# Altium PCB PCB1.PcbDoc
Units mm, origin at the board's own origin, x right, y up, seen from the top; angles counter-clockwise.
Board outline 47.12 x 28.32 mm, 2 copper layers (Top Layer, Bottom Layer); 13 components, 14 nets, 29 pads, 0 vias.
Unrouted connection lines stored in the file: 5.
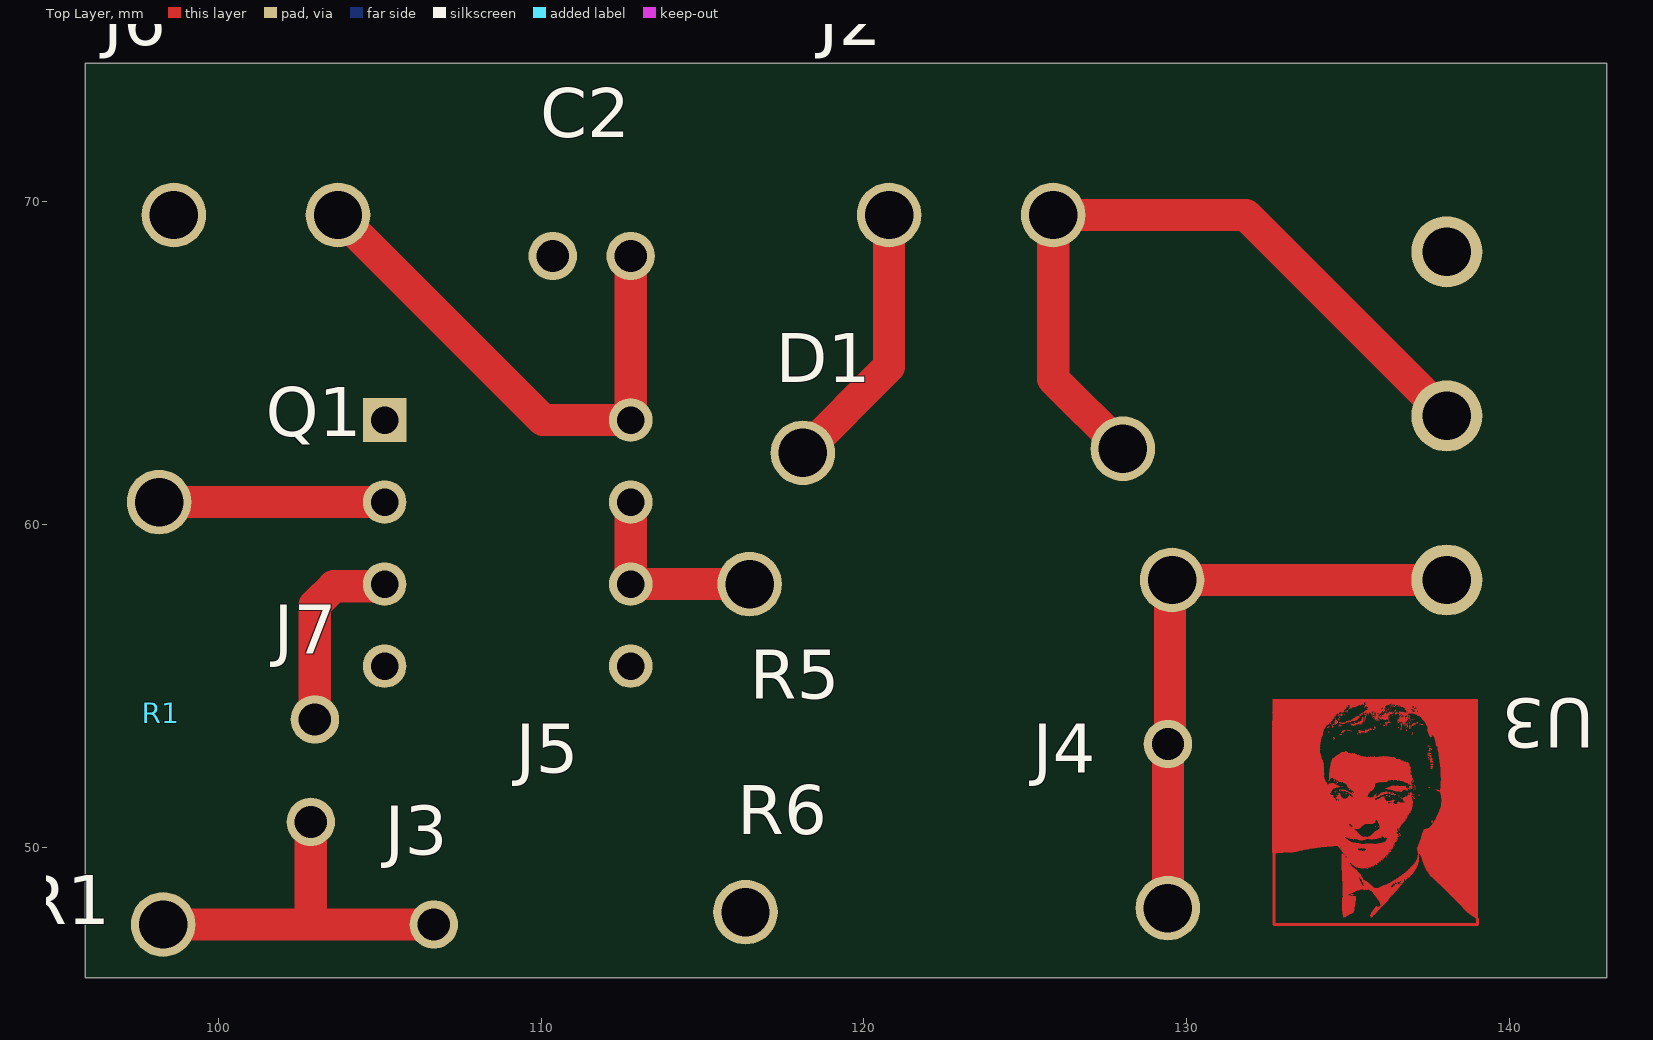
[diagram p0: Top Layer view]
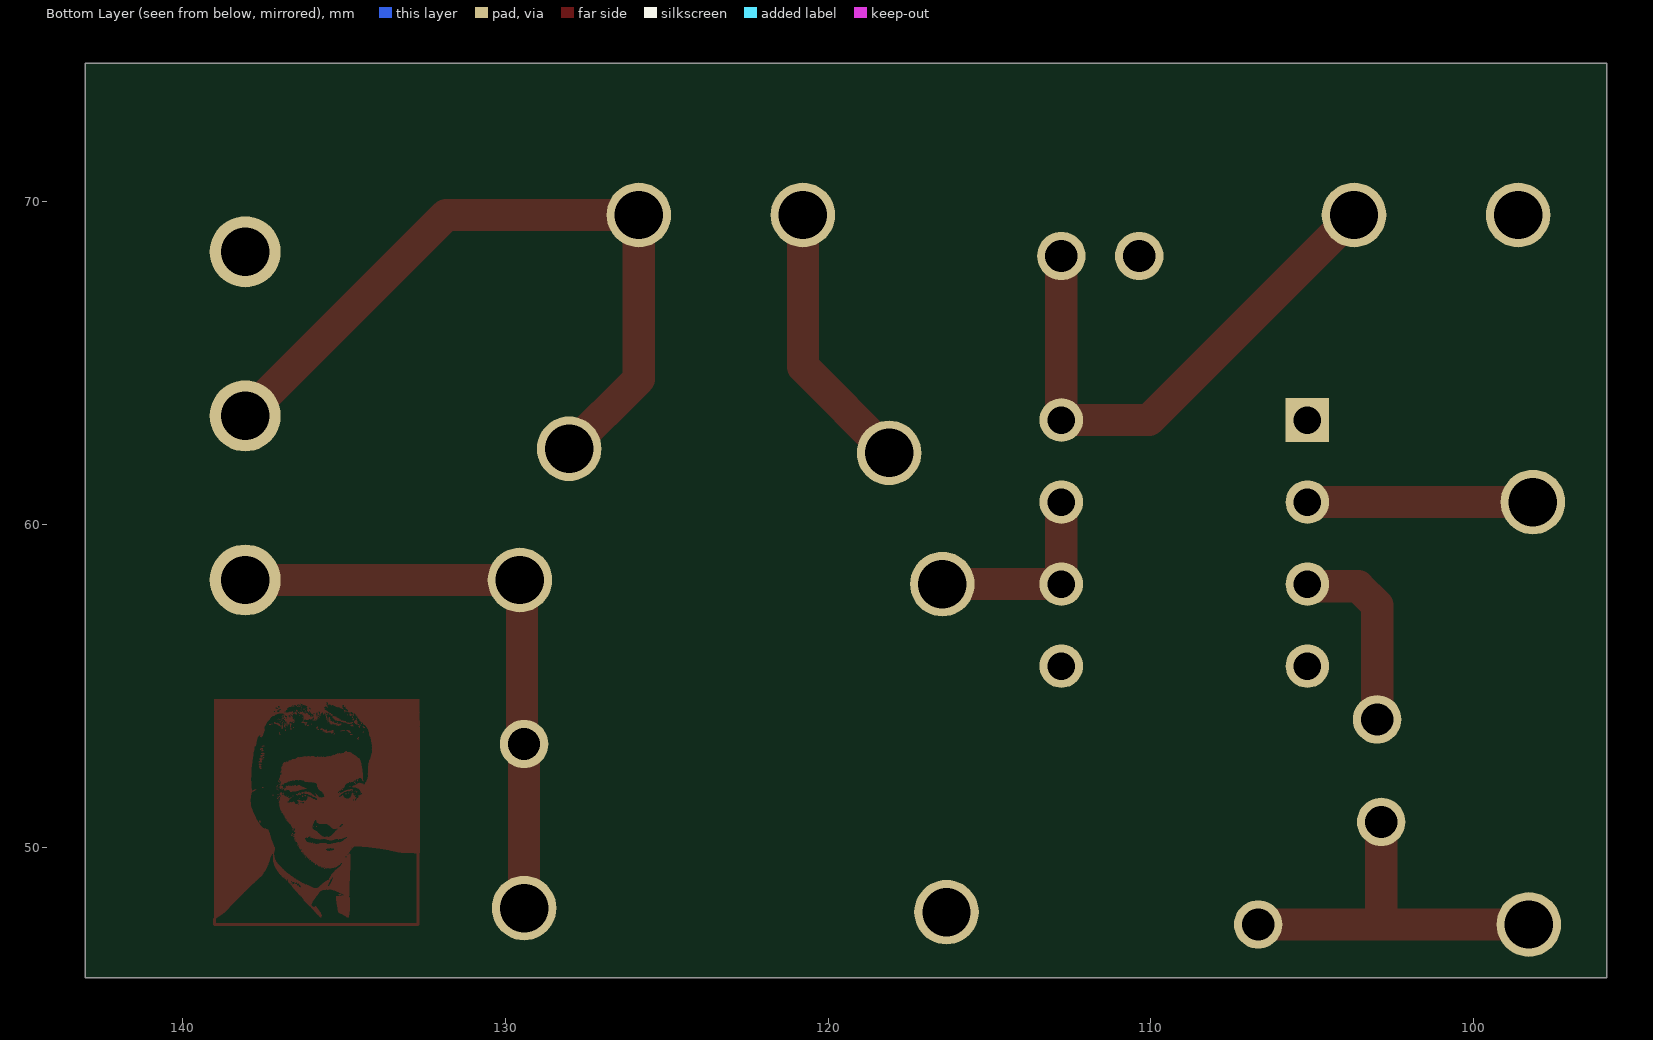
[diagram p1: Bottom Layer view, seen from below]
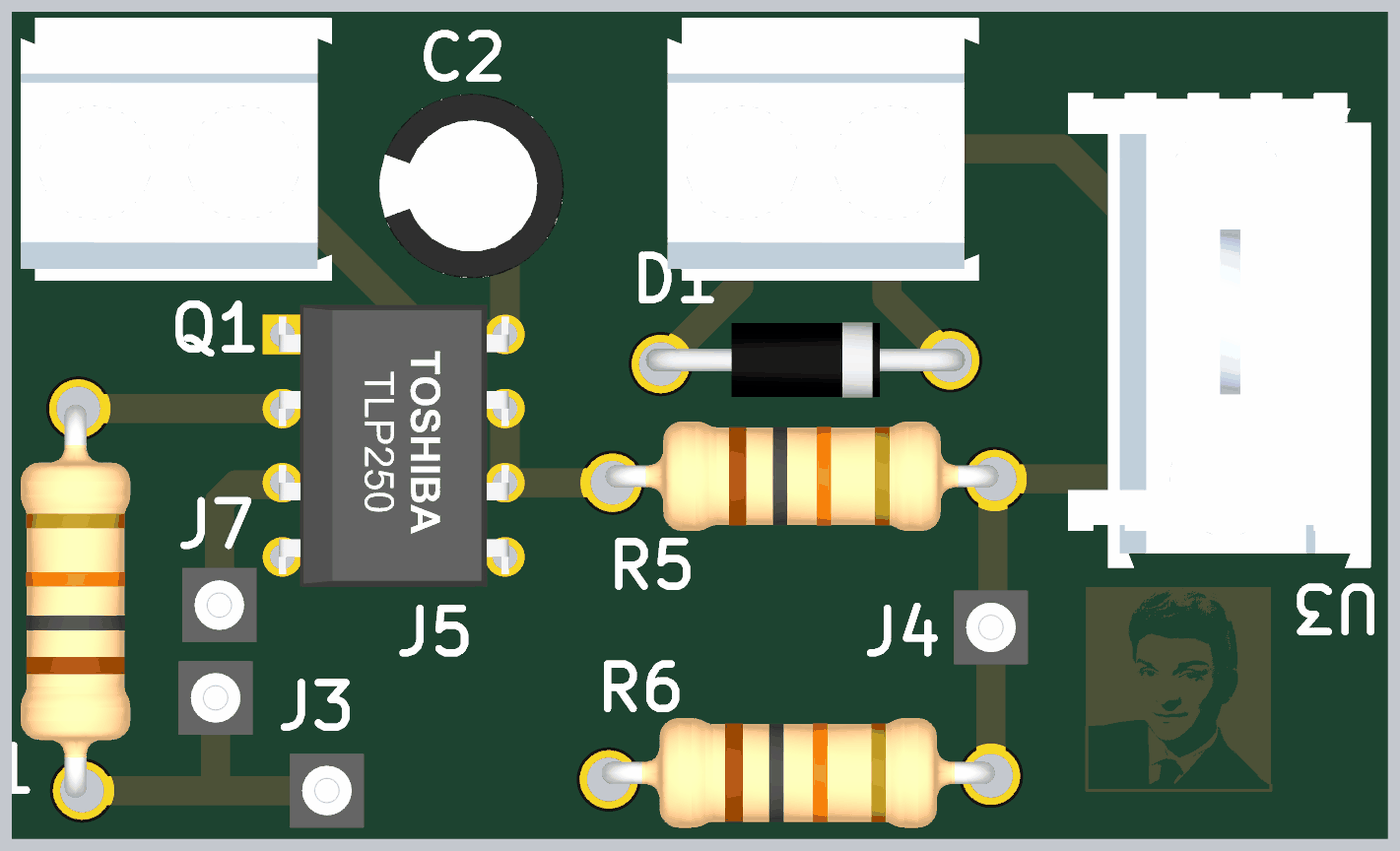
[diagram p2: 3D render of the assembled board from above, using the file's embedded part models]

## Layer stack, top to bottom
Top Solder: solder mask 0.0102, Solder Resist, Dk 3.5
Top Layer: signal copper 0.0356
Dielectric 1: dielectric 0.32, FR-4, Dk 4.8
Bottom Layer: signal copper 0.0356
Bottom Solder: solder mask 0.0102, Solder Resist, Dk 3.5

## Board outline
95.885,45.974 143.002,45.974 143.002,74.295 95.885,74.295

## Design rules (kind name [scope] priority, off if disabled: settings)
Clearance [All] p1: gap=0.4 ignorepadtopadclearanceinfootprint=FALSE
PolygonConnect [All] p1: connectstyle=Relief reliefconductorwidth=0.4 reliefentries=4 polygonreliefangle="90 Angle" airgapwidth=0.4
RoutingVias [All] p1: holewidth=0.711 width=1.27 viastyle="Through Hole" minholewidth=0.711 minwidth=1.27 maxholewidth=0.711 maxwidth=1.27
SolderMaskExpansion [All] p1: expansion=0.102 istentingtop=FALSE
Width [All] p1: maxlimit=2 minlimit=0.1 preferedwidth=1.5 minimp=50.000000 maximp=50.000000 favimp=50.000000
30 further rules are at their usual default settings.

## Components (designator, comment, footprint, x,y, rotation, side; value= is the part's Value field where it differs from the comment)
C2 "CAP" "Cap 5x10" 112.776,68.326 r180 top
D1 "Diode 1N5822" Diode 118.11,62.23 r180 top
J2 "Terminal" Terminal 125.857,69.596 r180 top
J3 "Header 1x1" "Header 1x1" 102.87,50.8 r0 top
J4 "Header 1x1" "Header 1x1" 129.413,53.213 r0 top
J5 "Header 1x1" "Header 1x1" 106.68,47.625 r0 top
J6 "Terminal" Terminal 103.712,69.596 r180 top
J7 "Header 1x1" "Header 1x1" 102.997,53.975 r0 top
Q1 "TLP250" FP-11-10C4-MFG 108.966,59.436 r0 top
R1 "THT RES Header" Res 98.171,60.706 r270 top
R5 "THT RES Header" Res 129.54,58.293 r180 top
R6 "THT RES Header" Res 129.413,48.133 r180 top
U3 "Logic_Mosfet" Logic_Mosfet 138.049,63.373 r90 top

## Footprints (in the part's own frame and the unit in brackets; to place one, negate y for a bottom-side part, rotate by r counter-clockwise, add the part's x,y. Pads: shape width x height; smd on the part's side, far side on the other; paste and mask are expansions set on the pad)
"Cap 5x10" [mm]
  round 1.5 hole 1: 1(0,0) 2(2.413,0)
  body extent -2.02,-3.16 4.3,3.16, height 1.6
Diode [mm]
  round 2 hole 1.5: 1(0,0) 2(-9.906,-0.127)
  body extent -10.41,-1.42 0.51,1.14, height 4.55
FP-11-10C4-MFG [mm]
  rect 1.35x1.35 hole 0.85 paste-1000 mask+0: 1(-3.81,3.81)
  round 1.35 hole 0.85 paste-1000 mask+0: 2(-3.81,1.27) 3(-3.81,-1.27) 4(-3.81,-3.81) 5(3.81,-3.81) 6(3.81,-1.27) 7(3.81,1.27) 8(3.81,3.81)
  body extent -5.26,-5.06 4.94,5.04, height 8.85
"Header 1x1" [mm]
  round 1.5 hole 1: 1(0,0)
  body extent -1.27,-1.27 1.27,1.27, height 6.02
Logic_Mosfet [mm]
  round 2.2 hole 1.5: 1(-5.08,0) 2(0,0) 3(5.08,0)
  body extent -8.13,-4.37 8.14,5.99, height 36.8
Res [mm]
  round 2 hole 1.5: 1(13.081,0.127) 2(0,0)
  body extent -0.13,-1.97 13.32,1.78, height 5.38
Terminal [mm]
  round 2 hole 1.5: 1(0,0) 2(5.08,0)
  body extent -3.15,-4.49 7.51,4.51, height 15.2

## Part data
C2: "Capacitor", ComponentLink1Description="Satın Alma Linki", ComponentLink1URL=https://www.robotistan.com/10nf-seramik-kondansator-paketi-10-adet, ComponentLink2Description="Satın Alma Linki", ComponentLink2URL=https://www.robotistan.com/1nf-seramik-kondansator-paketi-10-adet
D1: library part "Diode 1N5822 SMD", "SS34 1N5822 SMD Schottky Diode 3A 40V", ComponentLink1Description="Satın Alma Linki", ComponentLink1URL=https://bbcelektronik.com/diyot-diod-cesitleri/diyot-ve-kopru-diyot/prd-1n5819-1-amper-40-volt-smd-diyot-schottky-diyot-ss14-bbc13770, ComponentLink2Description=Datashhets, ComponentLink2URL=http://www.kesenes.com/pdf/1n5817-1n5819.pdf
J3 J4 J5 J7: "Header", ComponentLink3Description="Satın Alma Linki", ComponentLink3URL=https://www.robotistan.com/1x40-180-12mm
Q1: library part CMP-35887-000009-1, "Optocoupler Drive Push-Pull 1-CH 30V 600V 8-Pin PDIP", Forward Current=10mA, Forward Voltage=1.6V, Manufacturer=TOSHIBA, Max Junction Temp=+125°C, Max Supply Voltage=30V, Min Supply Voltage=10V, Package=11-10C4, Power Dissipation=800mW, Reverse Voltage=5V, Temperature="-20°C to +85°C", Temperature Range High=+85°C, Temperature Range Low=-20°C, Isolation Voltage=2500Vrms, Automotive=No, Category=Trans, ComponentLink2Description=Datasheet, ComponentLink2URL=https://toshiba.semicon-storage.com/info/docget.jsp?did=16821&prodName=TLP250, Device Class L1=Optoelectronics, Device Class L2=Optocouplers, Device Class L3=unset, Height=4.85mm, Lead Free=Yes, Manufacturer Part Number=TLP250, Octopart=https://octopart.com/tlp-250-toshiba-99104964, RoHS=TRUE, Standoff Height=0.55mm, Turn Off Delay Time=0.15us, Turn On Delay Time=0.15us, Ipc Land Pattern Name=DIP762W50P254L966H445Q8
R1 R5 R6: "THT RES", ComponentLink1Description="Satın Alma Linki", ComponentLink1URL=https://www.robotistan.com/14w-10k-direnc-paketi-10-adet, ComponentLink2Description="Satın Alma Linki", ComponentLink2URL=https://www.robotistan.com/14w-56k-direnc-paketi-10-adet, ComponentLink3Description="Satın Alma Linki", ComponentLink3URL=https://www.robotistan.com/14w-1k-direnc-paketi-10-adet, ComponentLink4Description="Satın Alma Linki", ComponentLink4URL=https://www.robomarket.com.tr/6-2k-direnc-1-adet-1-4w, ComponentLink5Description="Satın Alma Linki", ComponentLink5URL=https://www.robotistan.com/12w-75k-10-adet, ComponentLink6Description="Satın Alma Linki", ComponentLink6URL=https://www.direnc.net/75k-14w-metalfilm-direnc-paketi-100-adet-1?language=tr&h=cb2d2062, ComponentLink7Description="Satın Alma Linki", ComponentLink7URL=https://www.robotistan.com/14w-4k7-direnc-paketi-10-adet, ComponentLink8Description="Satın Alma Linki", ComponentLink8URL=https://www.robotistan.com/2w-120k, ComponentLink9Description="Satın Alma Linki", ComponentLink9URL=https://www.robotistan.com/14w-3k9-direnc-paketi-10-adet?language=tr&h=0f40f5ee&gclid=CjwKCAjwxOCRBhA8EiwA0X8hi8jDuTXAWIdHih4LhQcB3YXTjEJ8OgB0uW3rlfstCae65K6p5gflnBoC2EgQAvD_BwE, ComponentLink10Description="Satın Alma Linki", ComponentLink10URL=https://www.motorobit.com/urun/3-3m-1-4w-direnc-10-adet
J2 J6: ComponentLink1Description="Satın Alma Linki", ComponentLink2Description=Datasheet
U3: ComponentLink1Description="Satın Alma Linki", ComponentLink1URL=https://www.robotistan.com/buz101l-29a-50v-mosfet-logl-logic-level-to220?language=tr&h=3cb70a68, ComponentLink2Description="Satın Alma Linki", ComponentLink2URL=https://www.robolinkmarket.com/buz101l-29a-50v-mosfet-logl-logic-level-to220-mosfet, ComponentLink3Description=Datasheet, ComponentLink3URL=https://www.robolinkmarket.com/Data/EditorFiles/PDF/buz101l.pdf, ComponentLink4Description="Satın Alma Linki", ComponentLink4URL=https://www.direnc.net/3-pin-508mm-disi-gecmeli-klemens-11943, ComponentLink5Description="Satın Alma Linki", ComponentLink5URL=https://www.direnc.net/3-pin-508mm-90-gecmeli-takim-klemens, ComponentLink6Description="Satın Alma Linki", ComponentLink6URL=https://www.direnc.net/irlz44n-d2pak-smd-n-kanal-mosfet, ComponentLink7Description=Datasheet, ComponentLink7URL=https://pdf.direnc.net/upload/irlz44nslpbf-datasheet.pdf

## Nets (pads, with @x,y where several pads share a name; then routed paths per layer and width w, separated by ;. In a path a pad name is that pad's centre, name@x,y a point inside that pad or via, vN(x,y) a via of type N, cw(c..) or ccw(c..) an arc to the next point about the centre after c; other vN are vias at no path point)
12V: C2.1 D1.1 J2.2 J6.1 Q1.8 | length 25.2
  Top Layer w1: J6.1 110.062,63.246 Q1.8 C2.1 ; D1.1 120.777,64.897 J2.2
+5: 
GND: C2.2 J6.2 Q1.5 R6.1 U3.3
NetB1_1: 
NetB1_2: 
NetB1_3: 
NetD1_2: D1.2 J2.1 U3.2 | length 22.9
  Top Layer w1: D1.2 125.857,64.516 J2.1 131.826,69.596 U3.2
NetJ1_1: 
NetJ3_1: J3.1 J5.1 R1.1 | length 11.6
  Top Layer w1: R1.1 102.87,47.625 ; J3.1 102.87,47.625 ; J5.1 102.87,47.625
NetJ4_1: J4.1 R5.2 R6.2 U3.1 | length 18.7
  Top Layer w1: R6.2 J4.1 129.476,53.276 129.476,58.229 R5.2 U3.1
NetJ7_1: J7.1 Q1.3 | length 6
  Top Layer w1: J7.1 102.997,57.513 103.583,58.099 105.089,58.099 Q1.3
NetQ1_2: Q1.2 R1.2 | length 7
  Top Layer w1: R1.2 Q1.2
NetQ1_6: Q1.6 Q1.7 R5.1 | length 6.2
  Top Layer w1: Q1.7 Q1.6 R5.1
NetU1_2: 
pads on no net: Q1.1 Q1.4
copper on no net: | length 8.7
  Top Layer w0.1: 132.695,47.625 138.049,47.625 139,47.625 139,47.69 139,47.798 ; 132.698,47.642 132.698,49.382 132.698,49.832

## Other copper
Top Layer:
  drawing of 173 lines, arcs and shapes, not listed